# Altium PCB ExG_shield.PcbDoc (part 3 of 3)
Units mm, origin at the board's own origin, x right, y up, seen from the top; angles counter-clockwise.
Board outline 21.95 x 29 mm, 6 copper layers (Top Layer, GND/PWR1, SIG1, SIG2, GND/PWR2, Bottom Layer), stack 0.957 mm thick; 110 components, 127 nets, 621 pads, 428 vias.
Unrouted connection lines stored in the file: 2.
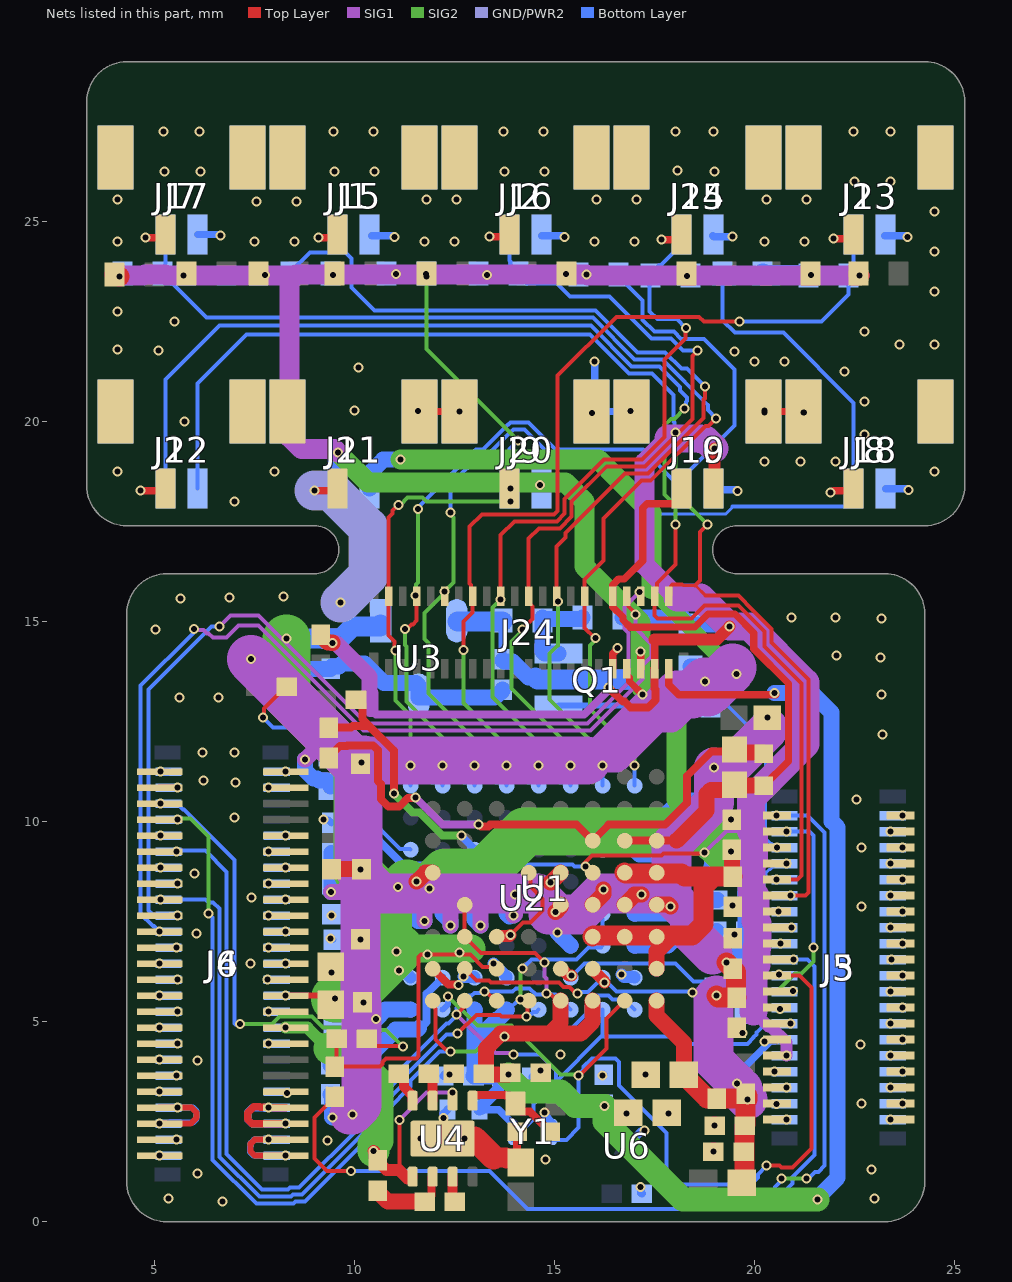
[diagram p6: the nets of this part, all layers, seen from the top]

## Via types
v1: diameter 0.25, hole 0.15, Top Layer to Bottom Layer, tented both sides, 300 vias
v2: diameter 0.25, hole 0.15, Top Layer to SIG1, tented both sides, 72 vias
v3: diameter 0.25, hole 0.15, SIG2 to Bottom Layer, tented both sides, 50 vias
v4: diameter 0.25, hole 0.15, Top Layer to GND/PWR1, tented both sides, 3 vias
v5: diameter 0.25, hole 0.15, Top Layer to Bottom Layer, 2 vias
v6: diameter 0.25, hole 0.15, GND/PWR2 to Bottom Layer, tented both sides, 1 vias

## Nets (pads, with @x,y where several pads share a name; then routed paths per layer and width w, separated by ;. In a path a pad name is that pad's centre, name@x,y a point inside that pad or via, vN(x,y) a via of type N, cw(c..) or ccw(c..) an arc to the next point about the centre after c; other vN are vias at no path point) (continued)
AGND: C3.2 C4.1 C5.2 C6.1 C17.2 C18.1 C19.2 C20.1 C41.1 C42.1 J1.2 J1.3 J1.4 J2.2 J2.3 J2.4 J7.2 J7.3 J7.4 J8.2 J8.3 J8.4 J9.2 J9.3 J9.4 J10.2 J10.3 J10.4 J11.3 J11.4 J12.3 J12.4 J13.2 J13.3 J13.4 J14.2 J14.3 J14.4 J15.2 J15.3 J15.4 J16.2 J16.3 J16.4 J17.2 J17.3 J17.4 J18.2 J18.3 J18.4 J19.3 J19.4 J20.2 J20.3 J20.4 J21.2 J21.3 J21.4 J22.2 J22.3 J22.4 J23.2 J23.3 J23.4 J24.10 J25.2 J25.3 J25.4 R4.1 R9.2 | length 19.1
  Top Layer w0.18: v1(4.65,18.275) 5.07,18.275 J22.2@5.15,18.355 ; v1(4.775,24.6) 5.195,24.6 J17.2@5.275,24.68 ; v1(9,18.275) 9.42,18.275 J21.2@9.5,18.355 ; v1(9.1,24.6) 9.52,24.6 J15.2@9.6,24.68 ; v2(11.577,20.273) 11.595,20.255 J21.3@11.625,20.255 v4(12.625,20.255) ; v1(13.375,24.625) 13.795,24.625 J16.2@13.875,24.705 ; J20.2@13.875,18.335 13.885,18.325 v4(13.9,18.325) ; J20.3@15.925,20.255 15.925,20.224 v2(15.929,20.22) ; J24.10@16.45,13.825 16.45,14.199 16.575,14.324 v1(16.575,14.343) ; v2(16.9,20.262) 16.907,20.255 J19.4@16.925,20.255 ; v1(17.675,24.55) 18.095,24.55 J14.2@18.175,24.63 ; v4(19.41,10.052) 19.423,10.052 C5.2@19.425,10.054 ; C4.1@19.45,7.082 19.459,7.091 19.459,7.134 v2(19.5,7.175) ; C3.2@19.45,7.871 v2(19.45,7.9) ; C6.1@19.55,4.846 19.567,4.846 v1(19.7,4.714) ; v2(20.25,20.225) 20.225,20.25 J19.3@20.225,20.255 J18.4@21.225,20.255 21.225,20.234 v2(21.229,20.23) ; v1(21.9,18.225) 21.919,18.225 21.969,18.275 22.315,18.275 22.395,18.355 J18.2@22.4,18.355 ; v1(21.975,24.575) 22.395,24.575 J13.2@22.475,24.655
  Top Layer w0.45: R9.2@17.271,3.675 v1(17.275,3.675) ; R4.1@17.8,2.725 17.825,2.725 v1(17.85,2.7) ; C42.1@18.968,1.75 v1(18.975,1.75) ; C41.1@18.996,2.4 v1(19,2.4)
  GND/PWR2 w1: v1(9,18.275) 9.418,18.275 10.338,17.354 10.338,16.163 v1(9.65,15.475)
  Bottom Layer w0.18: J7.2@6.075,24.68 6.617,24.68 v1(6.644,24.653) ; v1(9.225,10.055) 9.238,10.041 9.348,10.041 C20.1@9.417,9.972 ; v1(9.4,7.075) 9.421,7.054 C19.2@9.45,7.054 ; C18.1@9.417,7.683 9.417,7.658 v1(9.425,7.65) ; J1.2@10.425,24.65 10.967,24.65 v1(10.994,24.623) ; v6(14.637,18.415) 14.675,18.377 J9.2@14.675,18.335 ; J2.2@14.675,24.65 15.217,24.65 v1(15.244,24.623) ; v1(16,21.5) 16,20.33 J9.4@15.925,20.255 J10.3@16.925,20.255 ; J25.2@18.95,24.65 18.975,24.625 v1(19.45,24.625) ; J10.2@19,18.3 19.542,18.3 v1(19.569,18.273) ; J10.4@20.225,20.255 J10.4@20.23,20.255 ; v3(20.25,20.275) J10.4@20.23,20.255 ; v3(21.22,20.23) 21.22,20.25 J8.3@21.225,20.255 J10.4@20.23,20.255 ; J23.2@23.25,24.65 23.792,24.65 v1(23.819,24.623) ; J8.2@23.275,18.325 23.817,18.325 v1(23.844,18.298)
  other v1: 23.2,12.175 5.625,13.1 6.6,13.1 23.175,13.175 23.15,14.1 22.05,14.15 5.025,14.8 23.175,15.075 20.925,15.1 22.025,15.1 5.65,15.575 6.875,15.6 8.225,15.625 7,18 4.075,18.75 8,18.75 24.5,18.75 20.25,19 21.15,19 22.025,19 22.75,19.675 5.75,20 10,20.275 22.75,20.5 22.25,21.25 10.1,21.35 20,21.5 20.75,21.5 19.5,21.75 5.1,21.775 4.075,21.8 23.625,21.925 24.5,21.925 22.75,22.25 5.5,22.5 4.075,22.75 24.5,23.25 24.5,24.25 4.075,24.5 7.5,24.5 8.5,24.5 11.75,24.5 12.5,24.5 16,24.5 17,24.5 20.25,24.5 21.25,24.5 24.5,25.25 7.55,25.5 8.55,25.5 4.075,25.55 11.8,25.55 12.55,25.55 16.05,25.55 17.05,25.55 20.3,25.55 21.3,25.55 22.5,26 23.4,26 5.25,26.25 6.15,26.25 9.5,26.25 10.5,26.25 13.75,26.25 14.75,26.25 19,26.25 18.075,26.275 5.225,27.25 6.125,27.25 9.475,27.25 10.475,27.25 13.725,27.25 14.725,27.25 18.025,27.25 18.975,27.25 22.475,27.25 23.4,27.25
AVDD: C3.1 C5.1 C17.1 C19.1 C31.1 C32.1 J11.1 J24.6 R14.1 R15.2 R16.2 R17.2 R18.2 R19.2 R20.2 R21.2 R22.2 R23.2 R24.2 R25.2 R26.2 R27.2 R28.2 R29.2 R30.2 R31.2 U1.A4 U1.A6 U1.A7 U1.B4 U1.B6 U1.C6 U2.A4 U2.A6 U2.A7 U2.B4 U2.B6 U2.C6 U3.1 | length 80.4
  Top Layer w0.18: J24.6@17.15,13.825 v1(17.15,14.25)
  Top Layer w0.3: U1.C6@15.95,7.098 U1.C6@15.95,7.125 ; U1.B6@16.75,7.098 U1.B6@16.75,7.125 ; U1.A7@17.55,6.325 U1.A7@17.569,6.344 ; U1.A6@17.55,7.098 U1.A6@17.55,7.125 ; U1.A4@17.55,8.725 U1.A4@17.569,8.706
  Top Layer w0.4: U1.A7@17.55,6.325 17.55,6.75 17.95,7.15 ; v1(19.401,9.254) 19.401,9.272 C5.1@19.425,9.296 ; C5.1@19.437,9.284 19.437,8.641 C3.1@19.45,8.629
  Top Layer w0.5: R18.2@4,23.675 4.072,23.675 v1(4.122,23.625) ; U1.C6@15.95,7.125 15.975,7.15 17.95,7.15 18.432,7.15 18.725,7.443 18.725,8.379 18.975,8.629 ; U1.B4@16.75,8.725 16.775,8.7 18.175,8.7 18.246,8.629 18.975,8.629 ; C3.1@19.45,8.629 18.975,8.629 ; R30.2@22.6,23.7 22.6,23.675 v2(22.625,23.65)
  SIG1 w0.5: v1@4.088,23.713 4.15,23.65 4.725,23.65 4.75,23.675 5.275,23.675 5.3,23.65 v2(5.725,23.65) 8.5,23.65 8.525,23.675 v1(15.8,23.675) 15.825,23.65 v1@21.425,23.65 ; 8.375,23.65 8.375,19.605 8.668,19.312 9.5,19.312 v1(9.58,19.232) ; v1(21.412,23.663) v1@21.425,23.65 ; v2(22.625,23.65) v1@21.425,23.65
  SIG2 w0.5: v1(9.425,6.225) 9.425,5.656 v3(9.506,5.575) ; v1(9.58,19.232) 10.337,18.475 15.275,18.475 15.75,18 15.75,16.375 17.15,14.975 v1(17.15,14.25) 17.15,13.375 18.05,12.475 18.05,10.55 18.85,9.75
  SIG2 w0.7: v3@11.125,6.825 12.925,6.825 ; 11.306,8.45 11.753,8.45
  SIG2 w1.2: v3(8.3,14.575) 8.3,13.175 10.075,11.4 10.075,8.744 10.838,7.981 ; v3(9.506,5.575) 9.875,5.575 v3@11.125,6.825 ; 10.838,6.825 10.838,7.981 ; 11.306,8.45 10.838,7.981 ; v3(11.867,8.336) 12.256,8.725 13.225,8.725 14.25,9.75 18.85,9.75 19.346,9.254 v1(19.401,9.254)
  Bottom Layer w0.3: v3(11.05,6.75) 11.181,6.881 11.381,6.881 U2.A6@11.4,6.9 ; v3(11.082,8.368) 11.268,8.368 U2.A4@11.4,8.5 ; v3(11.109,6.278) 11.222,6.278 U2.A7@11.4,6.1 ; v3(11.825,6.675) 12.05,6.9 U2.B6@12.2,6.9 ; v3(11.867,8.336) 12.031,8.5 U2.B4@12.2,8.5 ; v3(12.625,6.725) 12.798,6.725 12.973,6.9 U2.C6@13,6.9
  Bottom Layer w0.4: v3(8.3,14.575) C31.1@8.3,14.579
  Bottom Layer w0.5: v3(8.3,14.575) 8.304,14.579 C32.1@9.4,14.579 9.408,14.586 9.657,14.586 9.95,14.879 10.631,14.879 10.65,14.898 U3.1@10.65,14.93 ; v1(9.425,6.225) 9.436,6.214 9.436,5.586 9.444,5.579 C17.1@9.45,5.579 9.45,5.575 v3(9.506,5.575) ; J11.1@9.575,18.335 9.575,19.227 v1(9.58,19.232) ; R19.2@20.224,23.686 20.211,23.7 R19.2@20.2,23.7 20.2,23.663 v1(21.412,23.663)
  other v1: 18.313,23.638 9.463,23.663 13.313,23.663 11.037,23.688
  other v2: 7.762,23.663 11.787,23.688 15.288,23.688
AVSS: C4.2 C6.2 C7.2 C8.2 C9.2 C10.2 C11.2 C12.2 C13.2 C14.2 C18.2 C20.2 C22.2 C23.2 C24.2 C25.2 C26.2 C27.2 C28.2 C29.2 C31.2 C32.2 C33.2 C34.2 C41.2 C42.2 J3.30 J5.30 J11.2 J24.8 R8.1 R9.1 R13.1 U1.A5 U1.A8 U1.B5 U1.C5 U1.D4 U1.D5 U1.H4 U2.A5 U2.A8 U2.B5 U2.C5 U2.D4 U2.D5 U2.H4 U3.3 | length 97.6
  Top Layer w0.18: J24.8@16.8,13.825 16.8,13.672 16.87,13.602 16.87,13.504 v2@17.199,13.175 ; v1(20.25,4.5) 20.26,4.5 20.31,4.55 J3.30@20.56,4.55
  Top Layer w0.4: C8.2@9.4,8.798 C8.2@9.417,8.815 10.135,8.815 v2(10.15,8.8) ; C14.2@10.106,7.119 10.142,7.083 C14.2@10.142,7.061 10.142,7.058 v2(10.15,7.05) ; C12.2@10.142,11.447 10.175,11.48 v2(10.175,11.486) ; C9.2@10.192,5.461 C9.2@10.192,5.483 10.217,5.483 v2(10.225,5.475) ; v2(11.55,8.5) 11.775,8.725 U1.H4@11.95,8.725 ; v2(14.897,8.484) 14.909,8.484 U1.D4@15.15,8.725 ; v2(15.023,7.742) 15.15,7.87 U1.D5@15.15,7.925 ; U1.C5@15.95,7.925 16.215,8.19 v2(16.215,8.301) ; U1.B5@16.75,7.925 17,8.175 v1(17.175,8.175) ; U1.A8@17.55,5.525 17.55,5.15 18.229,4.471 R9.1@18.229,3.675 ; U1.A5@17.55,7.925 17.85,7.925 v2(17.9,7.875) ; C13.2@20.316,12.6 v2(20.325,12.6)
  Top Layer w0.5: R9.1@18.229,3.675 18.25,3.675 18.336,3.589 18.336,3.553 18.811,3.079 19.042,3.079 C10.2@19.05,3.071 19.058,3.079 19.652,3.079 C11.2@19.761,3.189 ; v2(19.042,5.652) 19.083,5.611 19.542,5.611 C6.2@19.55,5.604 19.544,5.604 19.536,5.611 19.536,6.245 19.456,6.325 C4.2@19.45,6.325 v1(19.3,6.474) ; R13.1@19.675,0.975 19.746,1.046 19.746,2.392 C41.2@19.754,2.4 19.754,2.406 19.775,2.428 C11.2@19.775,3.079 ; C11.2@19.775,3.196 19.825,3.146 v2(19.825,3.05)
  SIG1 w0.4: v1(8.757,11.551) 9.143,11.937 9.537,11.937 ; v1(9.412,8.241) 9.666,8.241 v2@10.15,8.725 ; 11.675,8.2 11.76,8.115 11.76,7.825 11.746,7.81 v1(11.746,7.52) ; 12.325,8.2 12.389,8.136 v1(12.389,7.4) ; 13.125,8.2 13.15,8.175 v1(13.15,7.4) ; v1(13.975,7.65) 14.003,7.678 v1@14.003,8.072
  SIG1 w0.5: 18.95,6.675 19.099,6.675 v1(19.3,6.474)
  SIG1 w0.6: 18.435,13.175 18.185,12.925 17.825,12.925 17.2,12.925 15.8,11.525 16.55,11.525 17.55,12.525 17.925,12.525 18.625,13.225 18.825,13.225
  SIG1 w1: v1@9.875,2.675 v1(9.95,2.675) 10.175,2.9 10.175,5.45 10.15,5.475 v2(10.15,7.05) v2@10.15,8.725 ; v2(10.15,8.8) v2@10.15,8.725 ; 14.85,7.675 15.603,7.675 16.128,8.2 17.825,8.2 18.388,7.637 18.388,7.237 18.95,6.675 ; v2(15.023,7.742) 14.565,8.2 13.125,8.2 12.325,8.2 11.675,8.2 10.675,8.2 v2@10.15,8.725 ; 17.925,8.1 17.925,9.425 18.983,10.483 v1(18.983,11.359) ; v2(19.042,5.652) 18.975,5.585 18.975,4.04 v1(19.554,3.461) ; 19.2,11.175 20.35,12.325 ; v1@19.559,3.466 v1(19.554,3.461) ; v2(19.825,3.05) 19.69,3.185 19.69,3.326 v1(19.554,3.461)
  SIG1 w1.2: v1(7.412,14.062) 9.925,11.55 v2@10.214,11.55 ; v2@10.1,8.85 v2@10.1,11.4 ; v2@10.214,11.525 15.8,11.525 ; 17.825,12.925 18.075,13.175 18.435,13.175 v1(18.76,13.5) ; 18.825,13.225 19.45,13.85
  SIG2 w0.4: 17.425,15.812 v1(19.539,13.699)
  SIG2 w0.5: v1(11.15,19.05) 16.1,19.05 17.425,17.725 17.425,15.812
  Bottom Layer w0.18: v1(19.554,3.461) 19.568,3.475 19.568,3.686 20.431,4.55 J5.30@20.745,4.55 ; v1(20.25,4.5) 20.269,4.5 20.294,4.525 20.435,4.525 J5.30@20.505,4.525
  Bottom Layer w0.4: v1(7.412,14.062) 7.438,14.062 7.475,14.025 7.935,14.025 7.939,14.021 8.101,14.021 C31.2@8.3,13.821 C32.2@9.4,13.821 9.4,13.843 9.436,13.879 9.601,13.879 9.684,13.961 10.239,13.961 10.736,13.464 11.536,13.464 11.6,13.401 11.6,13.1 13.5,13.1 13.642,13.242 13.664,13.242 13.7,13.279 C33.2@13.7,13.3 ; v1(8.757,11.551) 8.757,11.288 8.97,11.075 9.06,11.075 9.11,11.025 9.294,11.025 9.4,10.919 C28.2@9.4,10.884 ; C26.2@9.392,3.186 9.428,3.15 9.428,2.622 v1(9.45,2.6) ; v1(9.412,8.241) 9.417,8.246 C18.2@9.417,8.44 C20.2@9.417,9.215 ; v1(9.95,2.675) 9.975,2.675 C25.2@10.1,2.8 ; J11.2@10.375,18.335 10.425,18.385 10.425,18.766 10.709,19.05 v1(11.15,19.05) ; v1(10.533,5.067) 10.767,5.3 U2.A8@11.4,5.3 ; U2.A5@11.4,7.7 11.58,7.52 v1(11.746,7.52) ; U2.B5@12.2,7.7 12.389,7.511 v1(12.389,7.4) ; U2.C5@13,7.7 13,7.55 v1(13.15,7.4) ; U2.D4@13.8,8.5 14.003,8.297 v1(14.003,8.185) ; U2.D5@13.876,7.624 U2.D5@13.8,7.7 13.85,7.65 v1(13.975,7.65) ; U2.H4@17,8.5 17.175,8.325 v1(17.175,8.175) ; R8.1@18.4,13.875 R8.1@18.425,13.875 ; v1(18.76,13.5) 18.76,13.54 R8.1@18.425,13.875 ; v1(18.983,11.359) 18.992,11.35 19.011,11.35 C27.2@19.042,11.319 ; C34.2@19.4,14.1 C34.2@19.4,14.079 ; v1(19.539,13.699) 19.4,13.837 C34.2@19.4,14.079 ; R8.1@18.425,13.875 19.196,13.875 C34.2@19.4,14.079
  Bottom Layer w0.5: C22.2@18.975,8.875 18.983,8.867 19.115,8.867 19.204,8.779 19.772,8.779 19.894,8.9 C23.2@19.9,8.9 ; v1(19.3,6.474) 19.824,6.999 C29.2@19.824,8.04 C23.2@19.824,8.83
  other v2: 17.2,13.175
B_IN1P: J7.1 J24.13 R20.1 U2.H1 | length 27.8
  Top Layer w0.1: v1(16.023,14.587) 16.001,14.587 15.75,14.838 J24.13@15.75,15.639 15.75,16.05 16.225,16.525 16.225,17.576 17.174,18.526 17.401,18.526 18.769,19.894 18.839,19.894 19.03,20.084 v1(19.038,20.084)
  SIG2 w0.1: v1(16.023,14.587) 16.023,14.547 15.887,14.41 15.887,12.813 17,11.7 v3(17,11.4)
  Bottom Layer w0.1: J7.1@5.275,24.68 5.275,23.775 R20.1@5.2,23.7 5.2,23.65 5.4,23.45 5.45,23.45 6.3,22.6 15.953,22.6 16.998,21.555 17.69,21.555 18.833,20.412 18.833,20.289 v1(19.038,20.084) ; U2.H1@17,10.9 v3(17,11.4)
B_IN2P: J1.1 J24.17 R15.1 U2.G1 | length 25.3
  Top Layer w0.1: v1(15.085,15.505) 15.085,15.604 J24.17@15.05,15.639 15.05,16.875 15.275,17.1 15.275,17.214 16.762,18.701 17.328,18.701 18.725,20.098 18.725,20.554 18.754,20.584 v1(18.754,20.879)
  SIG2 w0.1: v1(15.085,15.505) 15.085,14.412 14.875,14.202 14.875,13.05 16.2,11.725 v3(16.2,11.4)
  Bottom Layer w0.1: R15.1@8.4,23.7 8.4,23.75 8.88,24.23 9.375,24.23 J1.1@9.575,24.43 ; J1.1@9.575,24.68 J1.1@9.575,24.43 ; U2.G1@16.2,10.9 v3(16.2,11.4) ; v1(18.754,20.879) 18.309,21.325 18.167,21.325 17.762,21.73 17.07,21.73 16.025,22.775 10.5,22.775 9.925,23.35 9.925,24.08 J1.1@9.575,24.43
B_IN3P: J2.1 J24.21 R16.1 U2.F1 | length 20.7
  Top Layer w0.1: v1(14.196,14.809) 14.45,15.064 14.45,15.386 14.35,15.486 J24.21@14.35,15.639 14.35,17.075 14.61,17.335 15.132,17.335 15.425,17.628 15.425,18 16.301,18.876 17.256,18.876 18.45,20.07 18.45,21.641 18.575,21.766 v1(18.575,21.775)
  SIG2 w0.1: v1(14.196,14.809) 14.196,14.782 13.925,14.511 13.925,13.325 15.4,11.85 v3(15.4,11.4)
  Bottom Layer w0.1: J2.1@13.875,24.68 13.875,24.03 13.9,24.005 13.9,23.9 R16.1@14.1,23.7 14.1,23.65 14.3,23.45 15.063,23.45 15.388,23.125 16.372,23.125 17.417,22.08 17.907,22.08 18.212,21.775 v1(18.575,21.775) ; U2.F1@15.4,10.9 v3(15.4,11.4)
B_IN4P: J24.25 J25.1 R26.1 U2.E1 | length 18.5
  Top Layer w0.1: v1(13.65,15.55) 13.65,17.164 13.996,17.51 15.06,17.51 15.25,17.7 15.25,17.772 15.25,18.072 16.228,19.051 16.528,19.051 16.901,19.051 17.183,19.051 17.75,19.618 17.75,21.55 18.275,22.075 18.275,22.345 v1(18.277,22.347)
  SIG2 w0.1: v1(13.65,15.55) 13.45,15.35 13.45,13.122 14.6,11.972 v3(14.6,11.4)
  Bottom Layer w0.1: U2.E1@14.6,10.9 v3(14.6,11.4) ; J25.1@18.175,24.68 18.175,24.43 17.645,23.9 17.6,23.9 17.4,23.7 R26.1@17.4,23.65 17.375,23.625 17.375,22.759 17.568,22.566 18.054,22.566 18.273,22.347 v1(18.277,22.347)
B_IN5P: J23.1 J24.29 R27.1 U2.D1 | length 22.6
  Top Layer w0.1: v1(12.725,14.29) 12.725,15.011 12.95,15.236 J24.29@12.95,15.639 12.91,15.679 12.91,15.915 12.875,15.95 12.875,17.375 13.185,17.685 14.987,17.685 15.075,17.773 15.075,21.15 16.547,22.622 18.61,22.622 18.732,22.5 v1(19.625,22.5)
  SIG2 w0.1: v1(12.725,14.29) 12.725,12.966 13.8,11.891 v3(13.8,11.4)
  Bottom Layer w0.1: U2.D1@13.8,10.9 v3(13.8,11.4) ; v1(19.625,22.5) 21.675,22.5 22.35,23.175 R27.1@22.35,23.65 22.475,23.775 J23.1@22.475,24.68
B_IN6P: J8.1 J24.33 R19.1 U2.C1 | length 27.9
  Top Layer w0.1: J24.33@12.25,15.639 v1(12.25,15.75)
  SIG2 w0.1: v3(12.4,17.725) 12.4,17.684 12.475,17.609 12.475,15.975 v1(12.25,15.75) 12.25,15.715 11.75,15.215 11.75,14.564 11.85,14.464 11.85,13.201 13,12.051 v3(13,11.4)
  Bottom Layer w0.075: 17.47,17.697 19.282,17.697 19.45,17.866 19.45,17.875
  Bottom Layer w0.1: v1(12.25,15.75) v1@12.25,15.791 ; v3(12.4,17.725) 12.4,18.428 12.486,18.514 13.102,19.13 13.287,19.13 13.907,19.75 13.916,19.75 13.966,19.8 14.25,19.8 14.975,19.075 16.092,19.075 17.47,17.697 ; U2.C1@13,10.9 v3(13,11.4) ; R19.1@19.2,23.7 19.2,22.536 19.511,22.225 20.717,22.225 22.475,20.467 J8.1@22.475,18.335 22.475,18.085 22.275,17.885 19.46,17.885 19.45,17.875
B_IN7P: J10.1 J24.37 R24.1 U2.B1 | length 23.4
  Top Layer w0.1: v1(11.261,14.814) 11.302,14.814 11.423,14.935 11.458,14.935 11.55,15.027 11.55,15.6 J24.37@11.55,15.639 11.544,15.639 v1(11.525,15.658)
  SIG2 w0.1: v1(11.261,14.814) 11.261,14.423 11.3,14.384 11.3,13 12.2,12.1 v3(12.2,11.4) ; v1(11.525,15.658) 11.53,15.663 11.53,15.933 11.58,15.983 v3(11.58,17.82)
  Bottom Layer w0.1: v3(11.58,17.82) 11.58,17.855 13.03,19.305 13.207,19.305 13.827,19.925 13.843,19.925 13.893,19.975 14.35,19.975 15.02,19.305 16.437,19.305 17.205,19.305 J10.1@18.175,18.335 18.175,18.585 19.5,19.91 19.5,21.3 18.728,22.072 18.163,22.072 17.98,22.255 17.49,22.255 17.2,22.545 17.2,23.025 16.6,23.625 R24.1@16.6,23.675 ; U2.B1@12.2,10.9 v3(12.2,11.4)
B_IN8P: J9.1 J24.41 R23.1 U2.A1 | length 16.7
  Top Layer w0.1: v1(11.015,14.28) 10.996,14.299 10.996,14.507 10.85,14.653 10.85,17.6 10.95,17.7 10.95,17.777 11.091,17.918 v1(11.1,17.918)
  SIG2 w0.1: v1(11.015,14.28) 11.025,14.27 11.025,13.028 11.4,12.653 v3(11.4,11.4) ; v1(11.1,17.918) 11.141,17.918 11.322,18.1 11.689,18.1 11.789,18 v3(13.9,18) ; v3(11.8,23.625) 11.8,21.814 14.08,19.534 v3(14.08,19.525)
  Bottom Layer w0.1: U2.A1@11.4,10.9 v3(11.4,11.4) ; v3(11.8,23.625) R23.1@11.8,23.7 ; J9.1@13.875,18.025 v3(13.9,18) ; J9.1@13.875,18.335 13.875,19.32 v3(14.08,19.525)
B_VCAP1: C29.1 U2.H5 | length 2.2
  Bottom Layer w0.4: U2.H5@17,7.7 17.835,7.7 18.175,8.04 C29.1@19.067,8.04
B_VCAP2: C24.1 U2.H6 | length 2.2
  Bottom Layer w0.4: U2.H6@17,6.9 17.826,6.9 18.181,7.255 19.028,7.255 C24.1@19.038,7.265
B_VCAP3: C25.1 C26.1 U2.B7 | length 4.4
  Bottom Layer w0.2: 11.613,4.848 11.655,4.848 11.8,4.993 11.8,5.7 U2.B7@12.2,6.1
  Bottom Layer w0.4: C26.1@9.392,3.944 9.392,3.922 9.428,3.886 9.887,3.886 C25.1@9.999,3.774 ; C25.1@10.1,3.557 10.136,3.593 10.136,3.911 11.025,4.8 11.565,4.8 11.613,4.848
B_VCAP4: C27.1 U2.G3 | length 3.4
  Bottom Layer w0.2: U2.G3@16.2,9.3 16.6,9.7 17.25,9.7 17.425,9.875 17.475,9.875
  Bottom Layer w0.4: 17.475,9.875 18.125,10.525 19.006,10.525 C27.1@19.042,10.561
B_VREFP: C22.1 C23.1 U2.H3 | length 3.2
  Bottom Layer w0.4: U2.H3@17,9.3 17.125,9.175 17.675,9.175 17.7,9.15 ; C23.1@19.801,9.75 19.894,9.657 C23.1@19.9,9.657
  Bottom Layer w0.5: 17.7,9.15 17.95,9.15 18.425,9.625 18.968,9.625 C22.1@18.975,9.632 18.981,9.632 19.099,9.75 C23.1@19.801,9.75
B_WCT: C28.1 U2.D3 | length 6.4
  Bottom Layer w0.2: C28.1@9.4,11.716 9.4,11.681 9.606,11.475 9.739,11.475 10.175,11.039 10.175,9.957 11.232,8.9 13.166,8.9 13.4,9.134 13.4,9.154 13.517,9.271 13.771,9.271 U2.D3@13.8,9.3
BIAS: C34.1 J3.32 J5.32 J19.1 J24.4 R6.2 R8.2 R32.1 U1.C4 U2.C4 | length 45.8
  Top Layer w0.1: U1.C4@15.95,8.725 15.927,8.725 15.727,8.925 15.703,8.925 15.928,9.15 17.67,9.15 17.72,9.2 18.725,9.2 v2(18.75,9.225)
  Top Layer w0.18: J24.4@17.5,13.825 17.5,14.552
  Top Layer w0.2: v2(16.344,13.358) 16.702,13 16.75,13 16.9,12.85 17.335,12.85 17.525,13.04 17.525,13.31 17.5,13.335 J24.4@17.5,13.825
  Top Layer w0.3: 17.5,14.552 19.052,14.552 v1(19.375,14.875) ; J19.1@18.975,18.335 18.989,18.349 v2(18.989,19.328)
  Top Layer w0.4: R32.1@9.15,14.679 9.15,14.657 9.328,14.479 9.443,14.479 v2(9.443,14.474)
  SIG1 w0.1: v2(18.75,9.225) 19.292,9.767 19.908,9.767
  SIG1 w0.2: 10.392,12.817 10.535,12.675 15.732,12.675 16.35,13.293 v2@16.35,13.352 ; v2(16.344,13.358) v2@16.35,13.352 ; v2@16.35,13.375 v2@16.35,13.352
  SIG1 w0.3: 19.975,5.25 20.35,4.875 20.405,4.875 20.8,4.48 v1(20.8,4.15)
  SIG1 w0.4: v2(9.443,14.474) 9.523,14.474 10.375,13.622 10.375,13.228 10.392,13.211 10.392,12.817
  SIG1 w0.5: 17.85,19.575 17.25,18.975 17.25,16.419 18.069,15.6
  SIG1 w0.7: 17.85,19.575 18.65,19.575 18.675,19.55 18.767,19.55 v2(18.989,19.328) ; 18.069,15.6 18.65,15.6 v1(19.375,14.875) 19.875,14.875 21.275,13.475 21.275,11.942 19.908,10.574 19.908,9.767 19.976,9.698 19.976,9.015 19.925,8.964 19.925,8.238 20.025,8.138 20.025,7.512 20.075,7.462 20.075,6.875 20.05,6.85 20.05,6.421 19.975,6.346 19.975,5.25
  Bottom Layer w0.1: U2.C4@13,8.5 13.045,8.545 13.35,8.545 13.73,8.925 15.45,8.925 15.498,8.877 v1(15.775,8.877)
  Bottom Layer w0.4: R6.2@16.7,15.1 18.2,15.1 18.375,14.925 R8.2@18.4,14.925 19.354,14.925 19.379,14.9 C34.1@19.379,14.879 ; v1(19.375,14.875) 19.393,14.857 C34.1@19.4,14.857
CLK_EXT: J3.28 J5.28 U1.G8 U2.G8 Y1.2 | length 13
  Top Layer w0.1: v2(12.547,5.183) 12.75,5.386 U1.G8@12.75,5.525
  SIG1 w0.1: v2(12.547,5.183) 13.516,4.215 13.946,4.215 v1(13.975,4.186)
  Bottom Layer w0.1: Y1.2@13.95,2.04 14.475,2.565 14.475,2.938 15.031,3.494 ; v1(13.975,4.186) 14.628,4.186 15.031,3.783 15.031,3.494 ; U2.G8@16.2,5.3 16.2,4.663 16.162,4.625 ; v1(20.9,4.95) 20.265,4.95 20.039,4.724 20.039,4.678 19.975,4.614 19.975,4.6 19.814,4.439 18.1,4.439 17.914,4.625 16.2,4.625 16.162,4.625 ; 15.031,3.494 16.162,4.625
CSI_CLK_N: J3.17 J5.17
  other v1: 23.7,6.95
CSI_CLK_P: J3.19 J5.19
  other v1: 23.425,6.55
CSI_D0_N: J3.23 J5.23
  other v1: 23.4,5.75
CSI_D0_P: J3.25 J5.25
  other v1: 23.7,5.35
DVDD: C1.1 C2.1 C15.1 C16.1 C30.1 C40.1 J24.2 U1.C8 U1.D8 U1.G5 U1.G6 U2.C8 U2.D8 U2.G5 U2.G6 U6.A1 Y1.3 | length 47.6
  Top Layer w0.1: U1.G5@12.75,7.925 U1.G6@12.75,7.125 13.156,6.719 14.506,6.719 v2(14.75,6.475) ; v2(14.8,5.7) 14.829,5.671 14.923,5.671 15.069,5.525 U1.D8@15.15,5.525 U1.D8@15.093,5.582
  Top Layer w0.18: J24.2@17.85,13.825 17.85,13.425 18.1,13.175 20.525,13.175 20.525,13.187 v1(20.499,13.213)
  Top Layer w0.4: v1(13.85,3.675) 13.254,3.675 C1.1@13.229,3.7 13.25,3.7 13.286,3.736 13.286,4.336 13.65,4.7 14.875,4.7 ; U1.D8@15.15,5.525 15.15,4.975 14.875,4.7 ; U1.C8@15.95,5.525 15.95,5 15.65,4.7 14.875,4.7
  SIG1 w0.1: v2(14.75,6.475) 14.75,6.127 14.8,6.077 v2(14.8,5.7)
  SIG2 w0.1: v3(14.142,5.558) 14.142,6.226 14.2,6.284 v3(14.2,6.325)
  SIG2 w0.6: v1(13.85,3.675) 13.85,3.601 14.201,3.25 15.15,3.25 15.504,2.896 v1(16.25,2.896) 16.25,2.508 18.208,0.55 v3(21.575,0.55)
  Bottom Layer w0.1: U2.D8@13.8,5.3 13.843,5.3 14.101,5.558 v3(14.142,5.558) ; v3(14.2,6.325) 14.425,6.55 15.545,6.55 15.85,6.855 16.155,6.855 U2.G6@16.2,6.9 U2.G5@16.2,7.7
  Bottom Layer w0.18: C30.1@13.2,2.775 13.225,2.8 13.6,2.8 Y1.3@13.95,2.45
  Bottom Layer w0.2: 16.25,2.375 16.318,2.375 16.593,2.1 U6.A1@16.6,2.1
  Bottom Layer w0.3: C30.1@13.125,2.8 13.175,2.85 13.175,2.9 13.602,3.327 13.602,3.529 C16.1@13.688,3.615
  Bottom Layer w0.4: U2.C8@13,5.3 13,3.669 C15.1@12.971,3.64 12.983,3.627 13.676,3.627 C16.1@13.688,3.615 13.765,3.615 C16.1@13.825,3.675 ; 13.025,4.5 13.3,4.775 13.3,4.801 13.549,5.05 13.575,5.05 13.8,5.275 U2.D8@13.8,5.3 ; C40.1@16.225,2.921 v1(16.25,2.896) 16.25,2.375 ; v1(20.499,13.213) 21.437,13.213 21.925,12.725 21.925,10.01 22.075,9.86 22.075,1.1 v3@21.55,0.575
EXT_CHG/VUSB: J4.47 J4.48 J6.47 J6.48 | length 3.8
  Top Layer w0.15: v1(5.125,2.45) 5.9,2.45 6.05,2.6 6.05,2.725 5.925,2.85 v1(5.575,2.85) J4.47@5.125,2.85
  Bottom Layer w0.15: J6.48@5.345,2.45 5.37,2.475 5.95,2.475 6.05,2.575 6.05,2.762 5.962,2.85 J6.47@5.345,2.85
GND: C1.2 C2.2 C15.2 C16.2 C30.2 C35.2 C36.2 C38.2 C39.2 C40.2 J3.15 J3.21 J3.27 J4.8 J4.18 J4.33 J4.43 J5.15 J5.21 J5.27 J6.8 J6.18 J6.33 J6.43 R3.2 R4.2 U1.C7 U1.D7 U1.E4 U1.F6 U1.H7 U2.C7 U2.D7 U2.E4 U2.F6 U2.H7 U4.2 U4.9 U6.B1 Y1.4 | length 13.3
  Top Layer w0.1: U1.F6@13.55,7.125 U1.F6@13.569,7.144 ; v2(13.9,7.17) 14.205,7.475 14.395,7.475 14.7,7.78 14.7,8.07 14.395,8.375 14.395,8.68 U1.E4@14.35,8.725
  Top Layer w0.2: C38.2@11.747,0.5 11.768,0.5 11.922,0.654 11.922,1.1 U4.2@11.947,1.125 ; U1.H7@11.95,6.325 12.347,5.928 12.581,5.928 v2(12.59,5.919) ; R3.2@14.061,2.25 14.061,1.581 14.061,1.568 C35.2@14.15,1.479 ; v1(16.8,2.7) 16.818,2.7 R4.2@16.843,2.725
  Top Layer w0.3: U1.F6@13.569,7.144 13.874,7.144 v2(13.9,7.17) ; U1.D7@15.15,6.325 15.177,6.325 15.352,6.15 v2(15.425,6.15) ; U1.C7@15.95,6.325 15.95,6.298 16.25,5.998 v2(16.25,5.975)
  Top Layer w0.4: C36.2@10.575,0.775 10.575,0.754 10.829,0.5 C38.2@11.747,0.5
  Top Layer w0.5: 13.475,1.6 13.778,1.6 13.797,1.581 14.061,1.581 14.071,1.581 14.15,1.502 C35.2@14.15,1.479
  Top Layer w0.6: v5(12.747,2.075) 13,2.075 13.475,1.6
  Bottom Layer w0.1: U2.E4@14.6,8.5 15.05,8.05 15.05,7.25 v3(15.075,7.225)
  Bottom Layer w0.2: C15.2@12.213,3.64 12.248,3.675 v1(12.375,3.675) ; v1(12.215,2.599) 12.215,2.613 12.225,2.623 12.225,2.7 C30.2@12.325,2.8 ; C16.2@14.446,3.615 14.467,3.615 14.617,3.765 14.64,3.765 v1(14.65,3.775) ; v3(14.75,2.725) 14.76,2.715 14.76,2.654 14.95,2.464 Y1.4@14.95,2.45 ; v1(16.197,3.658) 16.205,3.658 C40.2@16.225,3.679 ; U6.B1@17,2.1 17.007,2.1 17.172,2.265 17.239,2.265 v1(17.248,2.275) ; v1(17.145,0.87) 17.155,0.86 17.155,0.724 C39.2@17.179,0.7
  Bottom Layer w0.3: v3(12.725,6.125) 12.731,6.119 12.981,6.119 U2.C7@13,6.1 ; v3(13.475,6.45) 13.8,6.125 U2.D7@13.8,6.1 ; v3(16.675,6.175) 16.731,6.119 16.981,6.119 U2.H7@17,6.1
  Bottom Layer w0.4: v3(15.075,7.225) U2.F6@15.4,6.9
  other v1: 6.7,0.5 5.35,0.575 23,0.575 6.075,1.2 22.925,1.3 14.775,1.55 9.325,2.025 22.675,2.95 6.075,4.025 15.15,4.175 22.65,4.425 5.575,4.45 7.85,4.45 23.4,4.95 23.7,6.15 7.4,6.45 6.05,7.2 23.4,7.35 22.675,7.875 7.425,8.1 5.575,8.45 7.85,8.45 6,8.7 22.675,9.35 7,10.1 22.55,10.55 7.025,10.975 6.225,11.025 6.2,11.725 7,11.725
  other v5: 11.647,2.075
I2C_A_SCL: J4.36 J6.36 J24.7 | length 24
  Top Layer w0.1: J24.7@16.8,15.639 16.84,15.599 16.84,15.383 17.021,15.203 v2(17.021,15.175)
  SIG1 w0.1: v1(5.981,14.819) 6.009,14.791 6.223,14.791 6.306,14.708 6.35,14.708 6.458,14.6 6.8,14.6 7.1,14.9 7.6,14.9 10.225,12.275 15.897,12.275 17.189,13.566 17.189,13.9 17.425,14.136 17.425,14.433 17.021,14.837 v2(17.021,15.175)
  Bottom Layer w0.1: J6.36@5.345,7.25 v1(5.125,7.25) 4.985,7.39 4.953,7.39 4.65,7.693 4.65,13.4 5.952,14.702 5.952,14.791 v1(5.981,14.819)
I2C_A_SDA: J4.35 J6.35 J24.5 | length 23
  Top Layer w0.1: v2(17.115,15.741) 17.115,15.674 J24.5@17.15,15.639
  SIG1 w0.1: v1(6.625,14.875) 6.9,15.15 7.6,15.15 10.3,12.45 15.825,12.45 16.85,13.475 16.85,14.719 16.746,14.823 16.746,15.372 v2(17.115,15.741)
  Bottom Layer w0.1: J6.35@5.345,7.65 5.32,7.675 4.959,7.675 4.85,7.784 4.85,13.3 6.425,14.875 v1(6.625,14.875)
  other v1: 5.575,7.65
I2C_B_SCL: J4.30 J6.30
  other v1: 5.14,9.65
I2C_B_SDA: J4.32 J6.32
  other v1: 5.14,8.85
MIC_CLK: J3.36 J5.36
  other v1: 20.8,3.35
MIC_DATA: J3.34 J5.34
  other v1: 20.5,3.75
MIC_THSEL: J3.38 J5.38
  other v1: 20.542,2.944
MIC_WAKE: J3.40 J5.40
  other v1: 20.8,2.55
MSP_CS: J4.12 J6.12
  other v1: 7.825,6.05
MSP_DR1: J4.13 J6.13
  other v1: 8.275,6.45
MSP_DR2: J4.21 J6.21
  other v1: 8.275,9.65
MSP_T\R\S\T\: J4.50 J6.50
  other v1: 5.125,1.65
MSP_TCK: J4.49 J6.49
  other v1: 5.55,2.05
MSP_TDI: J4.39 J6.39
  other v1: 5.575,6.05
MSP_TDO: J4.38 J6.38
  other v1: 5.125,6.45
MSP_TMS: J4.40 J6.40
  other v1: 5.125,5.65
MSP_VCC: J4.37 J6.37
  other v1: 5.55,6.85
NetC37_1: C37.1 U4.8 | length 0.8
  Top Layer w0.25: C37.1@11.097,3.7 11.118,3.7 11.229,3.589 11.229,3.367 11.447,3.15 U4.8@11.447,3.025
NetC37_2: C37.2 U4.7 | length 0.7
  Top Layer w0.25: C37.2@11.854,3.7 11.947,3.607 U4.7@11.947,3.025
NetC38_1: C38.1 U4.3 | length 0.6
  Top Layer w0.25: U4.3@12.447,1.125 12.447,0.557 C38.1@12.504,0.5
NetJ3_1: J3.1 J5.1
  other v1: 23.7,10.15
NetJ3_3: J3.3 J5.3
  other v1: 23.4,9.75
NetJ3_5: J3.5 J5.5
  other v1: 23.7,9.35
NetJ3_7: J3.7 J5.7
  other v1: 23.4,8.95
NetJ3_9: J3.9 J5.9
  other v1: 23.7,8.55
NetJ3_11: J3.11 J5.11
  other v1: 23.4,8.15
NetJ3_13: J3.13 J5.13
  other v1: 23.7,7.75
NetJ3_16: J3.16 J5.16 | length 0.5
  Top Layer w0.15: J3.16@20.56,7.35 v1(20.925,7.35)
  Bottom Layer w0.15: J5.16@20.745,7.35 v1(20.925,7.35)
NetJ3_18: J3.18 J5.18
  other v1: 20.65,6.95
NetJ3_29: J3.29 J5.29
  other v1: 23.7,4.55
NetJ3_31: J3.31 J5.31
  other v1: 23.4,4.15
NetJ3_33: J3.33 J5.33
  other v1: 23.7,3.75
NetJ3_35: J3.35 J5.35
  other v1: 23.4,3.35
NetJ3_37: J3.37 J5.37
  other v1: 23.7,2.95
NetJ3_39: J3.39 J5.39
  other v1: 23.4,2.55
NetQ1_1: Q1.1 R5.2 | length 2.8
  Bottom Layer w0.15: Q1.1@15.1,12.9 R5.2@17.9,12.9
NetQ1_2: Q1.2 R6.1 R7.2 | length 2.3
  Bottom Layer w0.4: Q1.2@15.1,14.2 14.75,14.2 14.7,14.25 14.7,15.1 14.737,15.062 15.663,15.062 R6.1@15.7,15.1
NetR2_1: R2.1 R3.1 U4.5 | length 2.5
  Top Layer w0.2: U4.5@12.947,3.025 12.947,3.137 12.972,3.162 13.754,3.162 13.767,3.15 13.872,3.15 14.022,3 14.022,2.9 14.172,2.75 14.382,2.75 14.882,2.25 R3.1@14.889,2.25
NetR10_2: R10.2 U2.A3 | length 7.1
  Top Layer w0.1: v1(7.704,12.604) 7.732,12.633 7.732,12.829 8.279,13.375 R10.2@8.3,13.375
  Bottom Layer w0.1: v1(7.704,12.604) 7.959,12.35 9.825,12.35 10.4,11.775 10.4,10.05 11.128,9.322 11.378,9.322 U2.A3@11.4,9.3
NetR11_2: R11.2 R35.1 U1.F7 | length 7.5
  Top Layer w0.1: R35.1@9.5,3.879 9.546,3.925 R11.2@9.546,4.575 ; R35.1@9.546,3.879 10.63,3.879 10.689,3.937 10.689,3.998 10.777,4.086 11.541,4.086 11.6,4.145 11.6,6.616 11.659,6.675 12.895,6.675 13.2,6.37 13.505,6.37 U1.F7@13.55,6.325
NetR12_2: R12.2 R36.1 U2.F7 | length 4.7
  Bottom Layer w0.1: U2.F7@15.4,6.1 15.75,6.45 18.025,6.45 18.475,6 18.871,6 R12.2@18.996,5.875 R36.1@18.996,5.175
not_used: J3.24 J5.24 | length 0.6
  Top Layer w0.1: J3.24@20.56,5.75 20.566,5.756 20.957,5.756 v1(20.963,5.762)
  Bottom Layer w0.1: J5.24@20.745,5.75 20.757,5.762 v1(20.963,5.762)
nRF_P0.04: J3.20 J5.20 R35.2 | length 21.4
  Top Layer w0.1: R35.2@9.5,3.121 9.5,3.1 9,2.6 9,1.575 9.309,1.266 v1(9.909,1.266) ; J3.20@20.56,6.55 v1(20.975,6.55)
  Bottom Layer w0.1: v1(9.909,1.266) 13.368,1.266 14.32,0.314 20.303,0.314 20.95,0.961 20.95,1.114 21.5,1.664 21.5,6.375 21.325,6.55 v1(20.975,6.55) J5.20@20.745,6.55
nRF_P0.05: J3.22 J5.22 U1.B8 U2.B8 Y1.1 | length 22.7
  Top Layer w0.1: v1@15.6,3.625 16.3,4.325 16.3,5.075 U1.B8@16.75,5.525 ; v1(20.3,1.4) 20.62,1.4 20.67,1.35 20.95,1.35 21.425,1.825 21.425,5.85 21.125,6.15 20.642,6.15 v1(20.608,6.184)
  SIG2 w0.1: v3(12.336,5.629) 13.065,4.9 13.914,4.9 15.139,3.675 15.575,3.675 v1(15.6,3.65)
  Bottom Layer w0.1: Y1.1@14.95,2.04 15.29,2.04 15.6,2.35 15.6,3.684 15.725,3.809 15.725,3.885 15.927,4.086 16.523,4.086 16.611,3.998 16.611,3.402 17.8,2.213 17.8,1.147 18.022,0.925 19.9,0.925 20.086,1.111 20.086,1.186 v1(20.3,1.4)
  Bottom Layer w0.15: U2.B8@12.2,5.3 12.336,5.436 v3(12.336,5.629)
nRF_P0.07/AMUX: J3.26 J5.26 R36.2 | length 1.1
  Bottom Layer w0.1: R36.2@19.754,5.175 19.929,5.35 J5.26@20.745,5.35
  other v1: 20.635,5.318
nRF_P0.12_GAP_GPIO64: J3.12 J5.12 J12.2 J24.1 | length 32
  Top Layer w0.075: 18.186,15.925 18.206,15.905 18.52,15.905 18.775,15.65
  Top Layer w0.1: J24.1@17.85,15.639 17.89,15.679 17.89,15.866 17.949,15.925 18.186,15.925 ; 18.503,15.905 18.629,16.031 18.629,17.241 v1(18.819,17.431) ; 18.775,15.65 19.597,15.65 19.961,15.286 20.425,14.822 20.425,14.475 21.35,13.55 21.35,8.225 21.275,8.15 v1(20.9,8.15) J3.12@20.56,8.15
  SIG2 w0.1: v3(18.025,19.725) 18.025,18.225 v1(18.819,17.431)
  Bottom Layer w0.1: J12.2@6.075,18.335 6.075,20.95 7.3,22.175 15.883,22.175 16.853,21.205 17.437,21.205 17.975,20.667 17.975,20.003 17.972,20 17.996,19.976 17.996,19.754 v3(18.025,19.725)
nRF_P0.31: J3.2 J5.2 U6.B2 | length 15.2
  SIG2 w0.1: v3(20.675,1.075) v3(21.3,1.075)
  Bottom Layer w0.1: U6.B2@17,1.7 18.2,0.5 20.225,0.5 20.508,0.783 20.508,0.867 20.675,1.034 v3(20.675,1.075) ; J5.2@20.745,10.15 21.325,10.15 21.75,9.725 21.75,1.4 21.592,1.242 21.508,1.242 21.341,1.075 v3(21.3,1.075)
  other v1: 20.54,10.15
nRF_P1.00_GAP_GPIO60: J3.4 J5.4 U1.G7 U2.G7 | length 13.5
  Top Layer w0.1: U1.G7@12.75,6.325 13.049,6.026 13.354,6.026 13.405,5.975 14.55,5.975 15.111,5.975 15.218,5.868 15.367,5.868 15.526,5.709 v1(15.567,5.709)
  SIG2 w0.1: v3(18.45,5.725) 18.475,5.75 20.562,5.75 21.012,6.2 21.175,6.2 21.475,6.5 v3(21.475,6.85)
  Bottom Layer w0.1: v1(15.567,5.709) 15.596,5.738 15.838,5.738 U2.G7@16.2,6.1 16.55,5.75 18.425,5.75 v3(18.45,5.725) ; v1(20.8,9.75) 21.375,9.75 21.475,9.65 v3(21.475,6.85)
nRF_P1.01_GAP_GPIO61: J3.6 J5.6 R5.1 | length 4.5
  Bottom Layer w0.075: R5.1@18.9,12.9 19.325,12.9 20.274,11.951 20.274,9.582 20.396,9.46 20.42,9.46 20.53,9.35 v1(20.551,9.35)
nRF_P1.09_GAP_GPIO62: J3.8 J5.8 R12.1 | length 3.7
  Bottom Layer w0.075: 20.225,8.521 20.277,8.574 20.277,8.722 20.358,8.803 20.382,8.803 20.53,8.95 J5.8@20.745,8.95 v1(20.8,8.95)
  Bottom Layer w0.1: R12.1@19.754,5.875 19.775,5.875 19.961,6.061 19.961,6.083 20.232,6.353 20.232,8.338 20.225,8.345 20.225,8.521
nRF_P1.11_GAP_GPIO63: J3.10 J5.10 J12.1 J24.3 | length 33.5
  Top Layer w0.1: v1(18.025,17.435) 18.025,16.425 17.562,15.962 17.562,15.89 17.54,15.869 17.54,15.832 17.5,15.792 17.5,15.15 17.568,15.082 18.42,15.082 18.742,15.405 19.595,15.405 20.25,14.75 20.25,14.375 21.175,13.45 21.175,8.65 21.075,8.55 J3.10@20.56,8.55 v1(20.55,8.55)
  SIG2 w0.1: v1(18.025,17.435) 18.025,17.9 17.75,18.175 17.75,19.914 17.904,20.068 17.993,20.068 v3(18.25,20.325)
  Bottom Layer w0.1: J12.1@5.275,18.335 5.275,21.05 6.625,22.4 15.905,22.4 16.925,21.38 17.617,21.38 18.13,20.867 18.13,20.78 18.306,20.604 18.306,20.522 18.279,20.494 18.279,20.354 v3(18.25,20.325)
nRF_QSPI_CLK: J4.20 J6.20
  other v1: 7.85,9.25
nRF_QSPI_CS_CONN: J4.14 J6.14
  other v1: 7.85,6.85
nRF_QSPI_IO0: J4.19 J6.19
  other v1: 8.275,8.85
nRF_QSPI_IO1: J4.17 J6.17
  other v1: 8.275,8.05
nRF_QSPI_IO2: J4.16 J6.16
  other v1: 7.85,7.65
nRF_QSPI_IO3: J4.15 J6.15
  other v1: 8.275,7.25
R\S\T\: J4.5 J6.5
  other v1: 8.305,3.222
REF_2.0V: C33.1 Q1.3 R7.1 U3.2 | length 5.7
  Bottom Layer w0.2: C33.1@13.7,14.057 R7.1@13.7,15.1
  Bottom Layer w0.4: C33.1@13.7,14.036 13.736,13.999 13.95,13.999 14.349,13.6 14.525,13.6
  Bottom Layer w0.5: U3.2@12.568,15 R7.1@13.7,15 ; 14.525,13.6 14.575,13.55 Q1.3@17,13.55
RLDINV: C21.1 R1.1 R33.2 U1.C3 | length 14.3
  Top Layer w0.2: R33.2@9.35,11.593 9.35,11.614 9.628,11.892 9.81,11.892 9.823,11.905 10.461,11.905 10.578,11.788 10.578,11.016 10.653,10.941 10.653,10.565 10.843,10.375 11.113,10.375 11.328,10.59 11.515,10.59 v2(11.525,10.6) ; v2(13.1,9.925) 13.114,9.925 13.155,9.883 13.343,9.883 13.384,9.925 15.55,9.925 U1.C3@15.95,9.525 16.35,9.925 17.758,9.925 18.303,10.47 18.303,11.139 18.914,11.75 19.437,11.75 C21.1@19.492,11.805
  Top Layer w0.4: C21.1@19.492,11.805 19.561,11.736 20.192,11.736 R1.1@20.225,11.704
  SIG1 w0.2: v2(11.525,10.6) 12.2,9.925 v2(13.1,9.925)
RLDINV_ADS: R33.1 R34.2 U2.C3 | length 6.4
  Top Layer w0.2: R33.1@9.35,12.35 9.901,12.35 9.946,12.395 10.36,12.395 ; R34.2@10.032,13.05 10.054,13.05 10.19,12.914 10.19,12.565 10.36,12.395 ; v1(10.978,10.7) 10.978,11.777 10.36,12.395
  SIG2 w0.2: v1(10.978,10.7) 11.442,10.236 11.614,10.236 12.2,9.65 v3(12.675,9.65)
  Bottom Layer w0.2: v3(12.675,9.65) 12.675,9.638 13,9.313 U2.C3@13,9.3
RLDOUT: C21.2 J19.2 J24.9 R1.2 U1.A3 U1.B3 | length 17.1
  Top Layer w0.18: J19.2@18.175,18.335 18.175,18.11 18.015,17.95 17.305,17.95 17.2,17.845 17.2,16.525 16.747,16.072 16.602,16.072 16.45,15.92 16.45,15.37 16.705,15.116 16.705,15.045 16.89,14.86 17.362,14.86 17.37,14.867 18.509,14.867 18.831,15.19 19.505,15.19 19.975,14.72 19.975,14.325 20.846,13.454 20.846,11.514 20.229,10.896 R1.2@20.225,10.896
  Top Layer w0.2: U1.B3@16.75,9.525 U1.A3@17.55,9.525 18.05,9.525
  Top Layer w0.4: 18.05,9.525 18.8,10.275 18.8,10.691 18.904,10.795 19.382,10.795 19.492,10.905 C21.2@19.492,10.925 19.506,10.911 20.211,10.911 R1.2@20.225,10.896
SPI_A_CLK: J4.31 J6.31 U1.F8 U2.F8 | length 20.7
  Top Layer w0.1: v1(13.242,5.751) 13.283,5.751 13.508,5.525 U1.F8@13.55,5.525
  Bottom Layer w0.1: v1(5.55,9.25) 5.575,9.275 6.273,9.275 6.8,8.748 6.8,1.688 7.688,0.8 8.33,0.8 8.38,0.85 8.61,0.85 10.152,2.392 10.398,2.392 10.486,2.48 10.486,2.956 11.05,3.52 11.05,3.7 12.3,4.95 12.345,4.95 12.55,5.155 12.55,5.345 12.855,5.65 12.917,5.65 12.989,5.722 13.213,5.722 v1(13.242,5.751) 13.945,5.75 14.028,5.833 14.372,5.833 14.53,5.675 15.025,5.675 U2.F8@15.4,5.3
SPI_A_CS: J4.28 J6.28 R11.1 | length 11.9
  Top Layer w0.1: R11.1@10.304,4.575 10.49,4.389 11.187,4.389 v1(11.201,4.375)
  SIG2 w0.1: v3(7.135,4.947) 7.936,4.947 8.114,5.125 8.931,5.125 9.206,4.85 9.942,4.85 10.001,4.792 10.784,4.792 v1(11.201,4.375)
  Bottom Layer w0.1: J6.28@5.345,10.45 5.565,10.45 5.705,10.31 5.737,10.31 7,9.047 7,4.95 7.025,4.925 7.047,4.947 v3(7.135,4.947)
  other v1: 5.14,10.45
SPI_A_MISO: J4.34 J6.34 U1.E8 U2.E8 | length 18.7
  Top Layer w0.1: v1(12.575,4.7) 13.043,5.168 13.63,5.168 13.673,5.125 v1(14.3,5.125) ; v1@14.293,5.107 14.325,5.14 14.325,5.5 U1.E8@14.35,5.525
  Bottom Layer w0.1: J6.34@5.345,8.05 6.275,8.05 6.339,7.986 6.454,7.986 6.615,7.825 6.615,7.71 6.625,7.7 6.625,1.615 7.615,0.625 8.403,0.625 8.453,0.675 8.682,0.675 10.224,2.217 10.471,2.217 10.661,2.408 10.661,2.884 11.225,3.447 11.225,3.605 12.3,4.68 12.555,4.68 v1(12.575,4.7) ; v1(14.3,5.125) 14.341,5.125 14.412,5.197 14.416,5.197 14.461,5.243 14.543,5.243 U2.E8@14.6,5.3
  other v1: 5.14,8.05
SPI_A_MOSI: J4.29 J6.29 U1.H8 U2.H8 | length 24.4
  Top Layer w0.1: U1.H8@11.95,5.525 12.007,5.468 12.007,5.334 12.025,5.316 12.025,4.55 12.268,4.307 12.302,4.307 12.359,4.25 v1(12.4,4.25)
  SIG2 w0.1: v1(5.575,10.05) 5.6,10.075 5.9,10.075 6.34,9.635 v3(6.34,7.711) ; v1(12.4,4.25) 13.025,4.25 13.4,4.625 v3(13.75,4.625)
  Bottom Layer w0.1: v3(6.34,7.711) 6.45,7.602 6.45,1.543 7.543,0.45 8.475,0.45 8.525,0.5 8.755,0.5 10.297,2.042 10.543,2.042 10.836,2.335 10.836,2.811 11.4,3.375 11.4,3.533 12.117,4.25 v1(12.4,4.25) ; v3(13.75,4.625) 13.775,4.65 15.245,4.65 15.8,5.205 15.8,5.395 16.055,5.65 16.345,5.65 16.445,5.55 16.75,5.55 U2.H8@17,5.3
SPI_B_CLK: J4.27 J6.27 | length 0.7
  Top Layer w0.15: J4.27@5.125,10.85 v1(5.575,10.85)
  Bottom Layer w0.15: J6.27@5.345,10.85 v1(5.575,10.85)
SPI_B_CS: J4.24 J6.24
  other v1: 7.85,10.85
SPI_B_MISO: J4.26 J6.26 | length 0.2
  Top Layer w0.18: J4.26@5.125,11.25 v1(5.15,11.25)
  Bottom Layer w0.18: v1(5.15,11.25) J6.26@5.345,11.25
SPI_B_MOSI: J4.25 J6.25
  other v1: 8.275,11.25
SWDCLK: J4.45 J6.45
  other v1: 5.55,3.65
SWDIO: J4.46 J6.46
  other v1: 5.125,3.25
SWO: J4.44 J6.44
  other v1: 5.125,4.05
VA0: J4.41 J6.41
  other v1: 5.575,5.25
VA1: J4.11 J6.11 R14.2 | length 1.2
  Top Layer w0.15: v1(8.275,5.65) 9.4,5.65 R14.2@9.475,5.575
VBAT: J4.1 J4.2 J6.1 J6.2 | length 3.7
  Top Layer w0.15: v1(8.275,1.65) 7.5,1.65 7.4,1.75 7.4,1.95 7.5,2.05 7.825,2.05 J4.2@8.275,2.05
  Bottom Layer w0.15: J6.1@8.055,1.65 7.475,1.65 7.387,1.738 7.387,1.862 7.4,1.875 7.4,1.962 7.488,2.05 v1(7.85,2.05) J6.2@8.055,2.05
VD0: J4.42 J6.42
  other v1: 5.125,4.85
VD1: C36.1 J4.9 J6.9 U4.1 U4.6 | length 9
  Top Layer w0.1: 11.113,1.288 11.115,1.29 11.115,1.424 v2(11.115,2.54) ; U4.6@12.447,3.025 12.447,3.222 v2(12.45,3.225)
  Top Layer w0.25: U4.1@11.422,1.075 11.447,1.1 U4.1@11.447,1.125
  Top Layer w0.3: v1(10.475,1.767) 10.489,1.754 10.489,1.618 C36.1@10.575,1.532 10.575,1.511 10.798,1.288 11.113,1.288 U4.1@11.325,1.075
  SIG1 w0.1: v2(11.115,2.54) 11.8,3.225 v2(12.45,3.225)
  SIG2 w0.3: v1(8.275,4.85) 8.817,4.85 9.092,4.575 9.125,4.575 9.375,4.325
  SIG2 w0.8: 9.375,4.325 9.725,4.325 10.575,3.475 10.575,2.025 10.475,1.925 v1(10.475,1.767)
VD2: J4.10 J6.10
  other v1: 7.85,5.25
VQPS_FUSE_1V8: J3.14 J5.14
  other v1: 20.6,7.75
Vsys: J4.3 J4.4 J6.3 J6.4 | length 3.9
  Top Layer w0.18: v1(7.85,2.85) J4.4@8.275,2.85 ; J4.4@7.85,2.864 7.635,2.864 7.624,2.875 7.475,2.875 7.325,2.725 7.325,2.555 7.43,2.45 v1(8.275,2.45)
  Bottom Layer w0.18: J6.3@8.055,2.45 7.43,2.45 7.325,2.555 7.325,2.745 7.43,2.85 v1(7.85,2.85) J6.4@8.055,2.85
pads on no net: J5.41 J5.42 J5.43 J5.44 J6.56 J24.MP1 J24.MP2 J24.MP3 J24.MP4 U1.E3 U1.E5 U1.E6 U1.E7 U1.F3 U1.F4 U1.F5 U1.G4 U2.E3 U2.E5 U2.E6 U2.E7 U2.F3 U2.F4 U2.F5 U2.G4

## Polygon pours and split planes (outlines as drawn)
AGND on Top Layer "AGND_L01_P007" (solid, remove dead copper, pour order 7): 0,-2.5 27.5,-2.5 27.5,30 0,30
GND on Top Layer "GND_L01_P000" (solid, remove dead copper, pour order 0): 17.25,6.2 17.225,6.225 16.5,6.225 16.5,6.875 16.3,7.075 15.6,7.075 15.25,7.425 12.7,7.425 12.45,7.175 12.45,6.675 11.975,6.675 11.7,6.4 11.7,5.075 11.675,5.075 10.7,4.1 10.7,2.675 10.125,2.1 8.95,2.1 8.95,2.125 8.825,2.25 8.825,12.2 8.375,12.65 3.75,12.65 3.75,-0.075 4.95,-1.275 26.475,-1.275 26.475,10.975 26.35,11.1 20.925,11.1 20.925,10.95 20.15,10.175 20.15,1.725 19.925,1.5 17.75,1.5 17.75,2.05 17.4,2.4 17.4,3.15 16.95,3.15 16.725,3.375 16.725,4.7 17.225,5.2
AGND on GND/PWR1 "AGND_L02_P008" (solid, remove dead copper, pour order 8): 0,-2.5 27.5,-2.5 27.5,30 0,30
GND on GND/PWR1 "GND_L02_P001" (solid, remove dead copper, pour order 1): 17.25,6.2 17.225,6.225 16.5,6.225 16.5,6.875 16.3,7.075 15.6,7.075 15.25,7.425 12.7,7.425 12.45,7.175 12.45,6.675 11.975,6.675 11.7,6.4 11.7,5.075 11.675,5.075 10.7,4.1 10.7,2.675 10.125,2.1 8.95,2.1 8.95,2.125 8.825,2.25 8.825,12.2 8.375,12.65 3.75,12.65 3.75,-0.075 4.95,-1.275 26.475,-1.275 26.475,10.975 26.35,11.1 20.925,11.1 20.925,10.95 20.15,10.175 20.15,1.725 19.925,1.5 17.75,1.5 17.75,2.05 17.4,2.4 17.4,3.15 16.95,3.15 16.725,3.375 16.725,4.7 17.225,5.2
AGND on SIG1 "AGND_L03_P009" (solid, remove dead copper, pour order 9): 0,-2.5 27.5,-2.5 27.5,30 0,30
GND on SIG1 "GND_L03_P002" (solid, remove dead copper, pour order 2): 17.25,6.2 17.225,6.225 16.5,6.225 16.5,6.875 16.3,7.075 15.6,7.075 15.25,7.425 12.7,7.425 12.45,7.175 12.45,6.675 11.975,6.675 11.7,6.4 11.7,5.075 11.675,5.075 10.7,4.1 10.7,2.675 10.125,2.1 8.95,2.1 8.95,2.125 8.825,2.25 8.825,12.2 8.375,12.65 3.75,12.65 3.75,-0.075 4.95,-1.275 26.475,-1.275 26.475,10.975 26.35,11.1 20.925,11.1 20.925,10.95 20.15,10.175 20.15,1.725 19.925,1.5 17.75,1.5 17.75,2.05 17.4,2.4 17.4,3.15 16.95,3.15 16.725,3.375 16.725,4.7 17.225,5.2
AVSS on SIG1 "AVSS_L03_P013" (solid, remove dead copper, pour order 13): 10.375,8.325 10.45,8.4 10.45,11.45 15.675,11.45 18.225,14 20.1,14 20.925,13.175 20.875,13.125 20.875,12.35 17.75,9.225 17.75,8.4 16.275,8.4 15.65,7.775 15.45,7.975 14.35,7.975
AGND on SIG2 "AGND_L04_P010" (solid, remove dead copper, pour order 10): 0,-2.5 27.5,-2.5 27.5,30 0,30
GND on SIG2 "GND_L04_P003" (solid, remove dead copper, pour order 3): 17.25,6.2 17.225,6.225 16.5,6.225 16.5,6.875 16.3,7.075 15.6,7.075 15.25,7.425 12.7,7.425 12.45,7.175 12.45,6.675 11.975,6.675 11.7,6.4 11.7,5.075 11.675,5.075 10.7,4.1 10.7,2.675 10.125,2.1 8.95,2.1 8.95,2.125 8.825,2.25 8.825,12.2 8.375,12.65 3.75,12.65 3.75,-0.075 4.95,-1.275 26.475,-1.275 26.475,10.975 26.35,11.1 20.925,11.1 20.925,10.95 20.15,10.175 20.15,1.725 19.925,1.5 17.75,1.5 17.75,2.05 17.4,2.4 17.4,3.15 16.95,3.15 16.725,3.375 16.725,4.7 17.225,5.2
AGND on GND/PWR2 "AGND_L05_P011" (solid, remove dead copper, pour order 11): 0,-2.5 27.5,-2.5 27.5,30 0,30
GND on GND/PWR2 "GND_L05_P004" (solid, remove dead copper, pour order 4): 17.25,6.2 17.225,6.225 16.5,6.225 16.5,6.875 16.3,7.075 15.6,7.075 15.25,7.425 12.7,7.425 12.45,7.175 12.45,6.675 11.975,6.675 11.7,6.4 11.7,5.075 11.675,5.075 10.7,4.1 10.7,2.675 10.125,2.1 8.95,2.1 8.95,2.125 8.825,2.25 8.825,12.2 8.375,12.65 3.75,12.65 3.75,-0.075 4.95,-1.275 26.475,-1.275 26.475,10.975 26.35,11.1 20.925,11.1 20.925,10.95 20.15,10.175 20.15,1.725 19.925,1.5 17.75,1.5 17.75,2.05 17.4,2.4 17.4,3.15 16.95,3.15 16.725,3.375 16.725,4.7 17.225,5.2
AGND on Bottom Layer "AGND_L06_P012" (solid, remove dead copper, pour order 12): 0,-2.5 27.5,-2.5 27.5,30 0,30
GND on Bottom Layer "GND_L06_P005" (solid, remove dead copper, pour order 5): 17.25,6.2 17.225,6.225 16.5,6.225 16.5,6.875 16.3,7.075 15.6,7.075 15.25,7.425 12.7,7.425 12.45,7.175 12.45,6.675 11.975,6.675 11.7,6.4 11.7,5.075 11.675,5.075 10.7,4.1 10.7,2.675 10.125,2.1 8.95,2.1 8.95,2.125 8.825,2.25 8.825,12.2 8.375,12.65 3.75,12.65 3.75,-0.075 4.95,-1.275 26.475,-1.275 26.475,10.975 26.35,11.1 20.925,11.1 20.925,10.95 20.15,10.175 20.15,1.725 19.925,1.5 17.75,1.5 17.75,2.05 17.4,2.4 17.4,3.15 16.95,3.15 16.725,3.375 16.725,4.7 17.225,5.2

## Keep-outs
Keep-Out Layer:
  the board outline again, w0.1

## Other copper
Top Layer:
  pour cut-out: 9.004,17.4 9,17.125 9,15.95 19.525,15.95 19.525,16.202 19.464,17.394
SIG1:
  pour cut-out: 9.017,17.391 9.014,17.116 8.998,15.925 19.55,15.976 19.539,16.193 19.477,17.385
SIG2:
  pour cut-out: 9.017,17.391 9.014,17.116 9.017,15.976 19.55,15.976 19.539,16.193 19.477,17.385
GND/PWR1:
  pour cut-out: 9.017,17.391 9.014,17.116 8.999,15.977 19.554,15.894 19.539,16.193 19.477,17.385
GND/PWR2:
  pour cut-out: 9.017,17.391 9.014,17.116 9.075,15.95 19.551,15.95 19.477,17.385
Bottom Layer:
  pour cut-out: 9.017,17.391 9.014,17.116 9.075,15.95 19.551,15.95 19.477,17.385

## Silkscreen, mask and mechanical layers (free items; w line width, h text height)
Top Overlay:
  text "A CH1" at 7.207,28.634 h1.2 r180
  text "A CH2" at 11.577,28.634 h1.2 r180
  text "A CH3" at 15.881,28.634 h1.2 r180
  text "A CH4" at 20.179,28.634 h1.2 r180
  text "A CH5" at 24.484,28.634 h1.2 r180
  text "A CH6" at 7.281,22.289 h1.2 r180
  text "A CH7" at 11.581,22.289 h1.2 r180
  text "A CH8" at 15.882,22.289 h1.2 r180
  text "REF" at 23.934,22.264 h1.2 r180
  text "RLD" at 18.47,21.264 h1 r90
  text "BIAS" at 19.47,21.237 h1 r90
  text "S.Frey" at 8.625,15.214 h1.52 r180
Board Layer Stack Bottom Overlay:
  drawing of 10 lines, arcs and shapes, not listed
  text "B CH1" at 4.259,28.609 h1.2 r180
  text "B CH2" at 8.489,28.609 h1.2 r180
  text "B CH3" at 12.785,28.609 h1.2 r180
  text "B CH4" at 17.087,28.609 h1.2 r180
  text "B CH5" at 21.382,28.609 h1.2 r180
  text "B CH7" at 17.11,22.284 h1.2 r180
  text "B CH6" at 21.385,22.264 h1.2 r180
  text "B CH8" at 12.788,22.228 h1.2 r180
  text "AVSS" at 10.269,21.215 h0.8 r270
  text "P0.12" at 6.579,21.2 h0.7 r270
  text "P1.11" at 4.7,21.166 h0.7 r270
  text "GPIO64" at 5.951,21.154 h0.7 r270
  text "AVDD" at 9.144,21.15 h0.8 r270
  text "GPIO63" at 4.101,21.128 h0.7 r270
  text "BioGAP" at 17.95,1.275 h1.52 r180
  text "ExG shield" at 8.825,1.258 h1.52 r180
Mechanical 1:
  text ".Pcb_File_Name_No_Path" at 0,-2.5 h1.52